# Altium PCB PICKIT2-Original-WithOut-Memory.PcbDoc
Units mm, origin at the board's own origin, x right, y up, seen from the top; angles counter-clockwise.
Board outline 73.66 x 33.66 mm, 2 copper layers (Top Layer, Bottom Layer); 69 components, 50 nets, 191 pads, 26 vias.
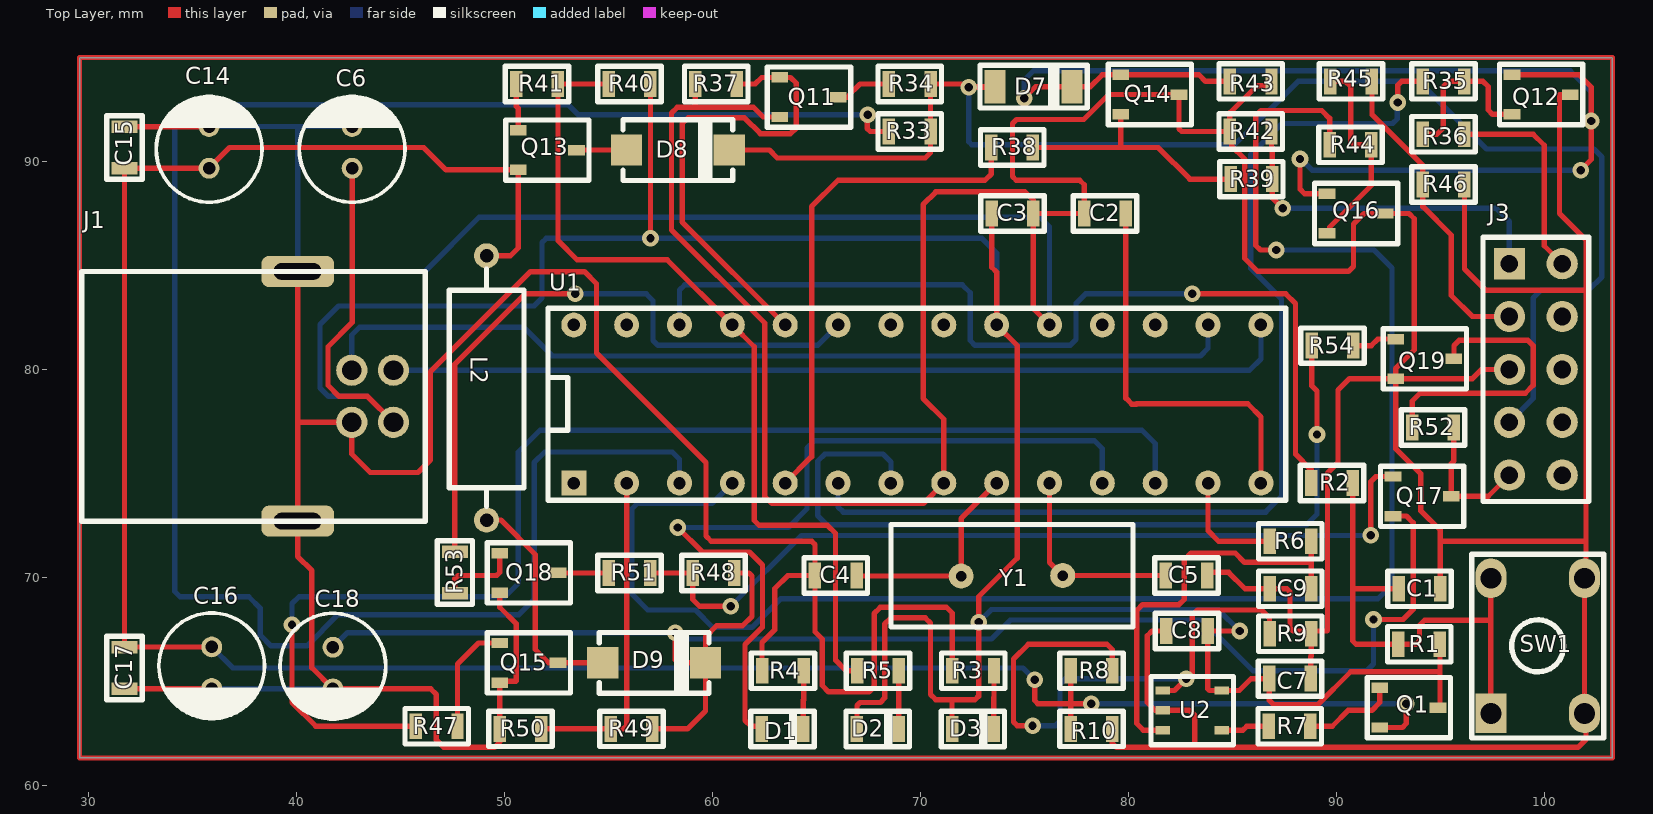
[diagram p0: Top Layer view]
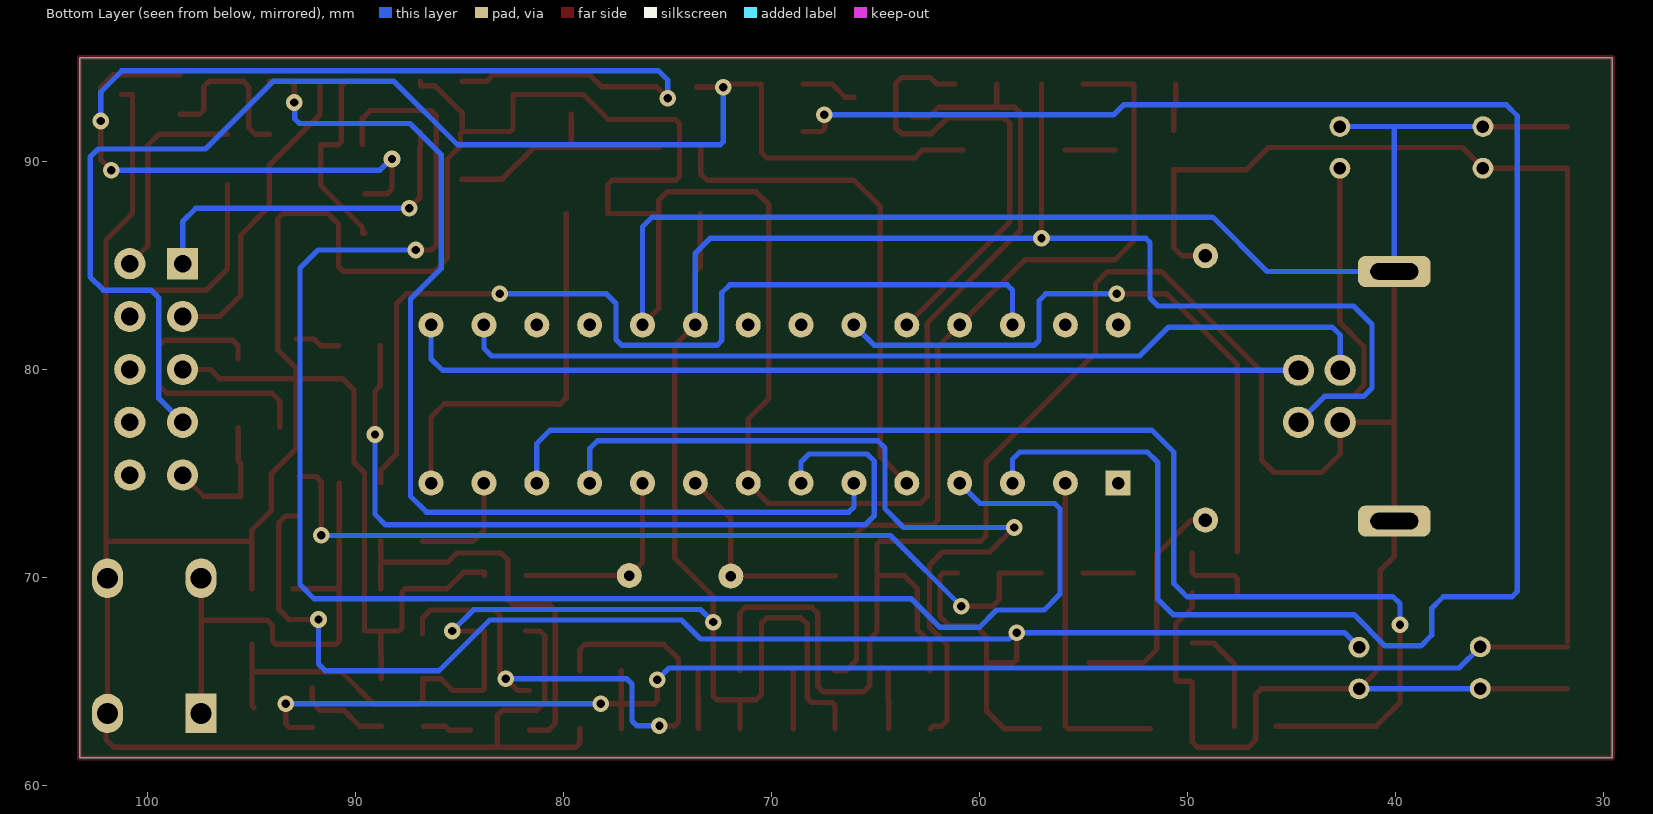
[diagram p1: Bottom Layer view, seen from below]

## Layer stack, top to bottom
Top Solder: solder mask 0.0102, Solder Resist, Dk 3.5
Top Layer: signal copper 0.0356
Dielectric 1: dielectric 0.32, FR-4, Dk 4.8
Bottom Layer: signal copper 0.0356
Bottom Solder: solder mask 0.0102, Solder Resist, Dk 3.5

## Board outline
29.591,61.341 103.251,61.341 103.251,94.996 29.591,94.996

## Design rules (kind name [scope] priority, off if disabled: settings)
Clearance [All] p1: gap=0.254 ignorepadtopadclearanceinfootprint=FALSE except(0: Arc-Hole Track-Hole SMDPad-Hole THPad-Hole Via-Hole Fill-Hole Poly-Hole Region-Hole Text-Hole)
PolygonConnect [All] p1: connectstyle=Relief reliefconductorwidth=0.254 reliefentries=4 polygonreliefangle="90 Angle" airgapwidth=0.254
RoutingVias [All] p1: holewidth=0.711 width=1.27 viastyle="Through Hole" minholewidth=0.711 minwidth=1.27 maxholewidth=0.711 maxwidth=1.27
SolderMaskExpansion [All] p1: expansion=0.102
Width [All] p1: maxlimit=0.254 minlimit=0.254 preferedwidth=0.254
30 further rules are at their usual default settings.

## Components (designator, comment, footprint, x,y, rotation, side; value= is the part's Value field where it differs from the comment)
C1 "100nF" C0805 93.98,69.469 r180 top
C2 "470nF" C0805 78.867,87.503 r0 top
C3 "100nF" C0805 74.422,87.503 r0 top
C4 "22pF" C0805 65.929,70.104 r0 top
C5 "22pF" C0805 82.788,70.104 r180 top
C6 "47uF" CAP_RAD_4mm 42.688,90.678 r90 top
C7 "22pF" C0805 87.757,65.151 r180 top
C8 "22pF" C0805 82.804,67.437 r0 top
C9 "100nF" C0805 87.773,69.469 r0 top
C14 "100uF" CAP_RAD_4mm 35.814,90.678 r90 top
C15 "102pF" C0805 31.75,90.678 r90 top
C16 "100uF" CAP_RAD_4mm 35.941,65.675 r270 top
C17 "102pF" C0805 31.75,65.659 r270 top
C18 "47uF" CAP_RAD_4mm 41.767,65.659 r270 top
D1 "RED" L0805RED 63.373,62.103 r0 top
D2 "YELLOW" L0805RED 67.945,62.103 r0 top
D3 "GREEN" L0805RED 72.517,62.103 r0 top
D7 "1N4148" SOD-80 75.438,93.599 r0 top
D8 "SS14" DO-214AC(SMA) 60.31,90.551 r180 top
D9 "SS14" DO-214AC(SMA) 59.167,65.913 r180 top
J1 "USB B Type" USB-B-TYPE 43.672,78.72 r0 top
J3 "Header 5x2 TH Pitch 2.54mm" "Header 5x2 TH Pitch 2.54mm" 99.568,80.01 r0 top
L2 "680uH" RES-0.5W-HH-MF 49.149,79.121 r90 top
Q1 "SI2301DS-N" SOT23-3 93.469,63.754 r270 top
Q11 "SI2301DS-N" SOT23-3 64.643,93.091 r270 top
Q12 "2N3906" SOT23-3 99.822,93.218 r270 top
Q13 "SI2301DS-P" SOT23-3 52.07,90.551 r270 top
Q14 "2N3906" SOT23-3 81.026,93.218 r270 top
Q15 "2N3904" SOT23-3 51.181,65.913 r270 top
Q16 "2N3906" SOT23-3 90.932,87.503 r270 top
Q17 "2N3906" SOT23-3 94.104,73.914 r270 top
Q18 "2N3904" SOT23-3 51.181,70.231 r270 top
Q19 "2N3904" SOT23-3 94.234,80.518 r270 top
R1 "10K" R0805 92.964,66.802 r180 top
R2 "33" R0805 90.773,74.549 r0 top
R3 "330" R0805 73.533,65.532 r0 top
R4 "330" R0805 64.389,65.532 r0 top
R5 "330" R0805 68.961,65.532 r0 top
R6 "10K" R0805 88.773,71.755 r0 top
R7 "100" R0805 88.741,62.865 r0 top
R8 "10K" R0805 77.216,65.532 r180 top
R9 "10K" R0805 88.773,67.31 r0 top
R10 "10K" R0805 77.216,62.738 r180 top
R33 "4K7" R0805 70.485,91.44 r0 top
R34 "1K" R0805 70.485,93.726 r0 top
R35 "10" R0805 96.139,93.853 r0 top
R36 "33" R0805 96.139,91.313 r0 top
R37 "10k" R0805 61.182,93.726 r0 top
R38 "10" R0805 75.406,90.678 r0 top
R39 "33" R0805 86.9,89.154 r0 top
R40 "10k" R0805 57.023,93.726 r0 top
R41 "330" R0805 52.578,93.726 r0 top
R42 "4k7" R0805 86.868,91.44 r0 top
R43 "820" R0805 86.868,93.853 r0 top
R44 "10" R0805 91.662,90.805 r0 top
R45 "33" R0805 91.694,93.853 r0 top
R46 "4k7" R0805 94.139,88.9 r180 top
R47 "1K" R0805 45.752,62.865 r180 top
R48 "100K" R0805 59.055,70.231 r180 top
R49 "4K7" R0805 55.118,62.738 r180 top
R50 "4K7" R0805 49.784,62.738 r180 top
R51 "10K" R0805 55.023,70.231 r180 top
R52 "100" R0805 93.631,77.216 r180 top
R53 "10K" R0805 47.625,69.247 r270 top
R54 "10K" R0805 90.805,81.153 r0 top
SW1 "Button Hole" BUTTON_HOLE_5.0mm 99.659,66.727 r180 top
U1 "PIC18F2550" DIP28_M04 69.85,78.349 r90 top
U2 "LMV321" SOT23-5 83.058,63.627 r90 top
Y1 "20MHz" HC-49S 76.835,70.079 r180 top

## Footprints (in the part's own frame and the unit in brackets; to place one, negate y for a bottom-side part, rotate by r counter-clockwise, add the part's x,y. Pads: shape width x height; smd on the part's side, far side on the other; paste and mask are expansions set on the pad)
BUTTON_HOLE_5.0mm [mm]
  rect 1.5x1.9 hole 1: 1(2.25,3.25)
  oval 1.5x1.9 hole 1: 2(2.25,-3.25) 3(-2.25,3.25) 4(-2.25,-3.25)
  silkscreen extent -3.18,-4.4 3.18,4.42, body extent -3,-3.86 3,3.86, height 5
C0805 [mm]
  rect 0.6x1.24 smd: 1(-1,0) 2(1,0)
  silkscreen extent -1.52,-0.85 1.53,0.85, body extent -1,-0.6 1,0.6, height 1
CAP_RAD_4mm [mm]
  round 1 hole 0.6: 1(-1,0) 2(1,0)
  silkscreen extent -2.63,-2.54 2.51,2.54, body extent -2.53,-2.53 2.52,2.53, height 7.29
DIP28_M04 [mm]
  rect 1.2x1.2 hole 0.6: 1(-3.8,16.51)
  round 1.2 hole 0.6: 2(-3.8,13.97) 3(-3.8,11.43) 4(-3.8,8.89) 5(-3.8,6.35) 6(-3.8,3.81) 7(-3.8,1.27) 8(-3.8,-1.27) 9(-3.8,-3.81) 10(-3.8,-6.35) 11(-3.8,-8.89) 12(-3.8,-11.43) 13(-3.8,-13.97) 14(-3.8,-16.51) 15(3.8,-16.51) 16(3.8,-13.97) 17(3.8,-11.43) 18(3.8,-8.89) 19(3.8,-6.35) 20(3.8,-3.81) 21(3.8,-1.27) 22(3.8,1.27) 23(3.8,3.81) 24(3.8,6.35) 25(3.8,8.89) 26(3.8,11.43) 27(3.8,13.97) 28(3.8,16.51)
  silkscreen extent -4.62,-17.7 4.6,17.75, body extent -3.9,-17.7 3.98,17.7, height 5.2
DO-214AC(SMA) [mm]
  rect 1.5x1.5 smd: 1(4.43,0) 2(-0.5,0)
  silkscreen extent -0.67,-1.5 4.61,1.5, body extent -0.67,-1.46 4.61,1.46, height 2.41
HC-49S [mm]
  round 1.2 hole 0.5: 1(0,-0.025) 2(4.88,0)
  silkscreen extent -3.37,-2.47 8.25,2.45, body extent -3.24,-2.33 8.11,2.32, height 3.5
"Header 5x2 TH Pitch 2.54mm" [mm]
  rect 1.5x1.5 hole 0.85: 1(-1.27,5.08)
  round 1.5 hole 0.85: 2(1.27,5.08) 3(-1.27,2.54) 4(1.27,2.54) 5(-1.27,0) 6(1.27,0) 7(-1.27,-2.54) 8(1.27,-2.54) 9(-1.27,-5.08) 10(1.27,-5.08)
  silkscreen extent -2.54,-6.35 2.54,6.35, body extent -2.54,-6.35 2.54,6.35, height 8.89
L0805RED [mm]
  rect 0.6x1.24 smd: 1(-1,0.625) 2(1,0.625)
  silkscreen extent -1.53,-0.23 1.52,1.47, body extent -1,0 1,1.25, height 1.1
R0805 [mm]
  rect 0.6x1.24 smd: 1(-2,0) 2(0,0)
  silkscreen extent -2.53,-0.85 0.53,0.85, body extent -2,-0.62 0,0.62, height 0.45
RES-0.5W-HH-MF [mm]
  round 1.2 hole 0.65: 1(-6.35,0) 2(6.35,0)
  silkscreen extent -5.7,-1.8 5.7,1.8, body extent -6.62,-1.8 6.63,1.8, height 3.9
SOD-80 [mm]
  rect 1x1.6 smd: 1(-1.85,0) 2(1.85,0)
  silkscreen extent -2.58,-1.02 2.58,1.02, body extent -1.82,-0.8 1.88,0.8, height 1.6
SOT23-3 [mm]
  rect 0.5x0.8 smd: 1(-0.95,-1.4) 2(0.95,-1.4) 3(0,1.4)
  silkscreen extent -1.45,-2 1.45,2, body extent -1.45,-1.4 1.45,1.4, height 1.3
SOT23-5 [mm]
  rect 0.4x0.7 smd: 1(0.95,1.424) 2(0,1.424) 3(-0.95,1.424) 4(-0.95,-1.425) 5(0.95,-1.425)
  silkscreen extent -1.65,-1.98 1.63,1.98, body extent -1.5,-1.5 1.5,1.5, height 1.45
USB-B-TYPE [mm]
  round 1.5 hole 0.95: 1(1,-1.25) 2(1,1.25) 3(-1,1.25) 4(-1,-1.25)
  rrect50% 3.5x1.5 hole 0.8 slot 2.3 at 0 deg: S1(-3.6,6) S2(-3.6,-6)
  silkscreen extent -13.97,-6 2.53,6, body extent -13.97,-7.42 2.53,7.37, height 11

## Part data
C1 C3 C4 C5 C7 C8 C9: library part C0805
C2 C15 C17: library part Capacitors(SMD)
C6 C14 C16 C18: library part Capacitor(Radian)
D1 D2 D3: library part LED0805
D7: library part "1N4148 (SOD-80)"
D8 D9: library part "Diode 1N4007-DO214AC(SMA)"
L2: library part "Resistors THD"
R1 R2 R3 R4 R5 R6 R7 R8 R9 R10 R33 R34 R35 R36 R37 R38 R39 R40 R41 R42 R43 R44 R45 R46 R47 R48 R49 R50 R51 R52 R53 R54: library part "Resistor SMD"
Y1: library part Crystal

## Via types
v1: diameter 0.8, hole 0.4, Top Layer to Bottom Layer, 26 vias

## Nets (pads, with @x,y where several pads share a name; then routed paths per layer and width w, separated by ;. In a path a pad name is that pad's centre, name@x,y a point inside that pad or via, vN(x,y) a via of type N, cw(c..) or ccw(c..) an arc to the next point about the centre after c; other vN are vias at no path point)
GND: C1.1 C2.1 C3.2 C4.1 C5.1 C6.2 C7.1 C8.1 C9.1 C14.2 C15.2 C16.2 C17.2 C18.2 J1.4 J1.S1 J1.S2 J3.5 Q11.2 Q12.3 Q14.3 Q15.2 Q16.3 Q18.2 Q19.2 R3.1 R4.1 R9.2 R10.1 R37.1 R42.1 R43.2 R46.1 R50.2 SW1.3 SW1.4 U1.8 U1.19 U2.2 | length 415.7
  Top Layer w0.254: C17.2 31.758,64.667 35.933,64.667 C16.2 ; C15.2 C14.2 ; J1.S1 40.072,77.47 ; Q18.2 49.781,68.583 50.571,67.793 50.571,65.049 50.546,65.024 49.842,65.024 Q15.2 49.781,63.833 49.784,63.83 R50.2 49.784,62.103 49.53,61.849 47.092,61.849 46.736,62.205 46.736,64.389 46.466,64.659 C18.2 40.754,65.672 40.754,70.345 40.072,71.028 J1.S2 40.072,77.47 ; R37.1 59.182,92.608 ; R4.1 62.389,66.889 62.992,67.492 62.992,69.469 63.627,70.104 C4.1 ; Q11.2 62.443,92.141 61.976,92.608 59.182,92.608 ; R3.1 71.533,68.294 71.247,68.58 68.072,68.58 67.772,68.28 67.772,64.77 67.518,64.516 65.583,64.516 65.278,64.821 65.278,67.056 64.929,67.405 C4.1 ; U1.19 75.422,82.927 C3.2 ; R10.1 79.216,62.052 79.419,61.849 83.185,61.849 ; C8.1 81.123,67.437 80.899,67.213 80.899,64.008 81.28,63.627 U2.2 82.931,63.627 83.185,63.373 83.185,61.849 ; C5.1 83.788,70.259 84.808,70.259 85.598,69.469 C9.1 87.608,69.469 87.757,69.32 87.757,67.586 87.906,67.437 R9.2@88.9,67.437 ; R43.2 86.868,93.643 86.169,93.643 84.868,92.343 R42.1 ; C7.1 88.757,66.218 88.773,66.234 R9.2 R9.2@88.9,67.437 ; Q19.2@92.812,79.568 90.617,79.568 90.068,79.019 90.068,75.54 89.56,75.032 89.56,67.462 89.535,67.437 R9.2@88.9,67.437 ; C1.1 94.98,71.755 ; R46.1 96.139,84.836 97.155,83.82 101.981,83.82 ; J3.5 96.962,80.01 96.52,79.568 Q19.2 ; Q12.3 100.711,93.218 100.711,87.503 101.981,86.233 101.981,83.82 ; 40.072,77.47 J1.4 42.672,75.946 43.561,75.057 45.847,75.057 46.457,75.667 46.457,79.908 51.257,84.709 53.848,84.709 54.432,84.125 54.432,80.797 59.69,75.54 59.69,72.009 59.944,71.755 64.77,71.755 64.929,71.596 C4.1 ; 59.182,92.608 58.318,92.608 58.039,92.329 58.039,86.716 62.519,82.236 62.519,73.914 62.865,73.568 70.139,73.568 U1.8 71.12,77.622 70.129,78.613 70.129,87.935 70.739,88.544 75.016,88.544 75.422,88.138 C3.2 ; C3.2 C2.1 77.867,88.884 77.648,89.103 74.6,89.103 74.422,89.281 74.422,91.821 74.618,92.017 77.843,92.017 79.045,93.218 Q14.3 82.426,91.57 82.556,91.44 R42.1 ; 83.185,61.849 101.6,61.849 101.981,62.23 101.981,63.405 SW1.3 101.909,69.723 101.981,69.795 101.981,71.755 ; R42.1 84.948,91.36 84.948,90.754 85.584,90.118 85.584,85.344 86.206,84.723 90.565,84.723 90.805,84.963 90.805,86.995 91.313,87.503 Q16.3 93.472,87.503 93.726,87.249 93.726,80.95 92.834,80.058 Q19.2 ; Q19.2 92.834,76.203 94.043,74.993 94.043,73.215 94.98,72.279 94.98,71.755 ; 94.98,71.755 101.981,71.755 ; 101.981,71.755 101.981,83.82
  Bottom Layer w0.254: C16.2@35.56,64.659 C18.2 ; C14.2@35.814,91.694 35.822,91.686 42.68,91.686 C6.2 ; 40.072,91.611 J1.S1 46.188,84.72 48.793,87.325 75.743,87.325 76.2,86.868 U1.19
NetC1_2: C1.2 R1.2 R2.2 SW1.1 SW1.2 | length 23.9
  Top Layer w0.254: R2.2 90.773,66.961 90.932,66.802 R1.2 93.831,66.802 93.98,66.951 93.98,67.706 94.234,67.96 97.394,67.96 97.409,67.945 ; 90.805,69.469 C1.2 ; SW1.1 97.409,67.945 ; SW1.2 97.409,67.945
NetC2_2: C2.2 U1.14 | length 18.9
  Top Layer w0.254: C2.2 79.867,78.629 80.159,78.337 80.369,78.337 80.391,78.359 85.725,78.359 86.36,77.724 U1.14
NetC4_2: C4.2 U1.9 Y1.2 | length 10.2
  Top Layer w0.254: C4.2 66.929,70.079 Y1.2 71.955,72.844 U1.9
NetC5_2: C5.2 U1.10 Y1.1 | length 9.7
  Top Layer w0.254: U1.10 76.2,70.739 Y1.1 C5.2
NetC9_2: C9.2 R6.2 U2.3 | length 19.9
  Top Layer w0.254: U2.3 80.706,62.677 80.391,62.992 80.391,68.431 80.667,68.707 82.423,68.707 82.677,68.961 82.677,70.866 82.995,71.183 85.128,71.183 85.573,70.739 88.773,70.739 ; C9.2 88.773,70.739 ; R6.2 88.773,70.739
NetC14_1: C14.1 C15.1 C16.1 C17.1 L2.2 Q1.2 Q13.2 R8.2 R10.2 | length 116.7
  Top Layer w0.254: C17.1@31.75,66.948 C15.1 C14.1 ; C17.1@31.758,66.667 35.933,66.667 C16.1 ; C14.1@35.814,89.694 36.798,90.678 46.126,90.678 47.203,89.601 Q13.2 50.67,85.849 50.292,85.471 L2.2 ; v1(75.489,65.1) 75.489,64.097 75.638,63.949 77.216,63.949 ; R10.2 77.216,63.949 ; R8.2 77.216,63.949 ; v1(78.199,63.949) 77.216,63.949 ; Q1.2 93.157,62.804 93.345,62.992 v1(93.345,63.949)
  Bottom Layer w0.254: C16.1@35.56,66.659 35.957,66.659 36.957,65.659 74.93,65.659 v1(75.489,65.1) ; v1(78.199,63.949) v1(93.345,63.949)
NetC18_1: C18.1 D9.2 Q17.2 R48.1 R49.1 | length 76.2
  Top Layer w0.254: R49.1 58.801,62.738 59.667,63.604 D9.2 ; v1(58.219,67.361) 58.219,66.062 58.368,65.913 D9.2 ; R48.1 61.751,70.231 61.9,70.082 61.9,68.146 61.445,67.691 60.198,67.691 59.667,67.16 D9.2 ; v1(91.77,67.996) 93.193,67.996 93.675,68.478 93.675,72.644 93.355,72.964 Q17.2
  Bottom Layer w0.254: C18.1 42.469,67.361 v1(58.219,67.361) 58.284,67.361 58.589,67.056 73.406,67.056 74.32,67.97 83.541,67.97 85.979,65.532 91.44,65.532 91.77,65.862 v1(91.77,67.996)
NetD1_1: D1.1 U1.11 | length 39.3
  Top Layer w0.254: v1(58.333,72.415) 59.517,71.232 61.788,71.232 62.408,70.612 62.408,67.626 61.57,66.788 61.57,63.144 61.849,62.865 62.236,62.865 D1.1
  Bottom Layer w0.254: v1(58.333,72.415) 63.652,72.415 64.551,73.314 64.551,76.235 64.897,76.581 78.359,76.581 78.74,76.2 U1.11
NetD1_2: D1.2 R4.2 | length 2.8
  Top Layer w0.254: D1.2 64.373,64.11 64.389,64.126 R4.2
NetD2_2: D2.2 R5.2 | length 2.8
  Top Layer w0.254: D2.2 68.961,62.728 R5.2
NetD3_2: D3.2 R3.2 | length 2.8
  Top Layer w0.254: D3.2 73.517,64.237 73.533,64.253 R3.2
NetD7_1: D7.1 D8.2 J3.7 R33.2 R34.2 | length 69.5
  Top Layer w0.254: D8.2 62.738,90.551 63.119,90.17 70.231,90.17 70.485,90.424 R33.2 R34.2 71.958,93.726 72.085,93.599 D7.1 73.588,93.574 v1(72.314,93.574)
  Bottom Layer w0.254: v1(72.314,93.574) 72.314,90.954 72.463,90.805 85.09,90.805 88.138,93.853 93.955,93.853 97.206,90.602 102.362,90.602 102.743,90.221 102.743,84.455 102.108,83.82 99.822,83.82 99.441,83.439 99.441,78.613 J3.7
NetD7_2: D7.2 Q12.1 Q14.1 Q16.1 R43.1 | length 65.4
  Top Layer w0.254: v1(74.981,93.04) 75.54,93.599 D7.2 78.172,93.599 78.741,94.168 Q14.1 83.378,94.168 83.693,93.853 R43.1 ; v1(88.24,90.119) 88.24,88.671 88.458,88.453 Q16.1 ; Q12.1 101.641,94.168 102.235,93.574 v1(102.235,91.948) 102.235,90.094 v1(101.727,89.586)
  Bottom Layer w0.254: v1(74.981,93.04) 74.981,93.904 75.438,94.361 101.219,94.361 102.235,93.345 v1(102.235,91.948) ; v1(88.24,90.119) 88.277,90.119 88.811,89.586 v1(101.727,89.586)
NetD8_1: D8.1 Q13.3 | length 2.4
  Top Layer w0.254: Q13.3 D8.1
NetD9_1: D9.1 L2.1 Q15.3 | length 11.1
  Top Layer w0.254: L2.1 49.835,72.771 51.486,71.12 51.486,66.548 52.121,65.913 Q15.3 D9.1
NetJ1_2: J1.2 U1.15 | length 43.5
  Bottom Layer w0.254: J1.2 85.812,79.97 86.36,80.518 U1.15
NetJ1_3: J1.3 U1.16 | length 44.8
  Bottom Layer w0.254: J1.3 42.672,81.661 43.053,82.042 50.927,82.042 52.309,80.66 83.454,80.66 83.82,81.026 U1.16
NetJ3_1: J3.1 R39.2 R42.2 | length 17.1
  Top Layer w0.254: R42.2 86.868,90.695 86.9,90.663 R39.2 86.9,88.265 v1(87.408,87.757)
  Bottom Layer w0.254: v1(87.408,87.757) 97.663,87.757 98.298,87.122 J3.1
NetJ3_2: J3.2 R36.2 | length 10.1
  Top Layer w0.254: R36.2 99.441,91.313 99.973,90.781 99.973,85.955 J3.2
NetJ3_3: J3.3 R45.2 R46.2 | length 15.1
  Top Layer w0.254: R45.2 91.694,92.253 94.139,89.808 R46.2 94.139,87.833 95.504,86.468 95.504,83.566 96.52,82.55 J3.3
NetJ3_9: J3.9 Q17.3 R52.1 | length 6.6
  Top Layer w0.254: R52.1 95.631,75.616 95.504,75.489 Q17.3 97.282,73.914 J3.9
NetQ1_1: Q1.1 R7.2 | length 4.5
  Top Layer w0.254: R7.2 89.789,62.865 90.551,63.627 91.694,63.627 92.069,64.002 Q1.1
NetQ11_1: Q11.1 R37.2 U1.24 | length 23
  Top Layer w0.254: R37.2 62.055,93.726 62.37,94.041 Q11.1 63.754,94.041 64.033,93.762 64.033,91.618 63.754,91.338 62.306,91.338 61.544,92.1 58.826,92.1 58.547,91.821 58.547,87.102 U1.24
NetQ11_3: Q11.3 R34.1 | length 2.7
  Top Layer w0.254: Q11.3 66.458,93.091 67.093,93.726 R34.1
NetQ12_2: Q12.2 R35.2 R36.1 | length 7.8
  Top Layer w0.254: R36.1 94.82,91.313 95.123,91.616 95.123,93.599 95.377,93.853 R35.2 97.028,93.853 97.282,93.599 97.282,92.478 97.492,92.268 Q12.2
NetQ13_1: Q13.1 R41.1 | length 2.3
  Top Layer w0.254: R41.1 50.578,92.65 50.67,92.558 Q13.1
NetQ14_2: Q14.2 R38.2 R39.1 | length 11.7
  Top Layer w0.254: R38.2 79.629,90.678 ; Q14.2 79.626,90.681 79.629,90.678 ; R39.1 82.946,89.154 81.422,90.678 79.629,90.678
NetQ15_1: Q15.1 R47.1 | length 5.4
  Top Layer w0.254: R47.1 47.752,65.847 48.768,66.863 Q15.1
NetQ16_2: Q16.2 R44.2 R45.1 | length 10
  Top Layer w0.254: Q16.2 89.655,86.553 89.655,86.843 91.662,88.85 R44.2 90.827,90.805 90.678,90.954 90.678,93.599 90.424,93.853 R45.1
NetQ17_1: Q17.1 R48.2 R51.1 | length 41.2
  Top Layer w0.254: R51.1 R48.2 59.055,68.961 59.385,68.631 v1(60.884,68.631) ; v1(91.643,72.034) 91.643,74.625 91.882,74.864 Q17.1
  Bottom Layer w0.254: v1(60.884,68.631) 64.287,72.034 v1(91.643,72.034)
NetQ18_1: Q18.1 R53.2 | length 3.9
  Top Layer w0.254: R53.2 47.625,69.955 47.774,70.104 49.632,70.104 49.781,70.253 Q18.1
NetQ18_3: Q18.3 R51.2 | length 2.4
  Top Layer w0.254: Q18.3 R51.2
NetQ19_1: Q19.1 R54.2 | length 2.2
  Top Layer w0.254: R54.2 91.662,81.153 91.977,81.468 Q19.1
NetQ19_3: Q19.3 R52.2 | length 14
  Top Layer w0.254: R52.2 93.631,78.496 94.002,78.867 99.06,78.867 99.441,79.248 99.441,81.153 99.187,81.407 95.885,81.407 95.634,81.156 Q19.3
NetR2_1: R2.1 U1.26 | length 45.1
  Top Layer w0.254: v1(83.058,83.642) 87.554,83.642 88.019,83.177 88.019,75.938 88.773,75.184 R2.1
  Bottom Layer w0.254: U1.26 58.42,83.82 58.674,84.074 72.009,84.074 72.39,83.693 72.39,81.407 72.629,81.168 77.191,81.168 77.47,81.447 77.47,83.185 77.927,83.642 v1(83.058,83.642)
NetR5_1: R5.1 R40.1 R41.2 U1.25 | length 41.4
  Top Layer w0.254: R40.1 R41.2 52.578,86.199 53.496,85.281 57.828,85.281 U1.25 62.011,81.098 62.011,72.757 62.251,72.517 65.532,72.517 65.913,72.136 65.913,66.04 66.421,65.532 R5.1
NetR7_1: R7.1 U2.4 | length 2.3
  Top Layer w0.254: U2.4 85.496,62.677 85.684,62.865 R7.1
NetR8_1: R8.1 R9.1 U2.1 | length 28.8
  Top Layer w0.254: v1(75.387,62.89) 74.651,62.89 74.473,63.068 74.473,66.091 75.184,66.802 78.962,66.802 79.216,66.548 R8.1 ; U2.1 82.205,64.577 v1(82.779,65.151) 83.058,65.43 83.058,68.199 83.312,68.453 86.392,68.453 86.773,68.072 R9.1
  Bottom Layer w0.254: v1(75.387,62.89) 76.479,62.89 76.708,63.119 76.708,64.897 76.962,65.151 v1(82.779,65.151)
NetR33_1: R33.1 U1.3 | length 93.5
  Top Layer w0.254: v1(67.462,92.253) 67.437,92.227 67.437,91.589 67.586,91.44 R33.1
  Bottom Layer w0.254: U1.3 58.42,75.692 58.074,76.038 51.943,76.038 51.435,75.53 51.435,68.961 50.698,68.224 42.012,68.224 40.513,66.726 38.786,66.726 38.278,67.234 38.278,68.529 37.719,69.088 34.417,69.088 34.163,69.342 34.163,92.202 34.696,92.735 53.061,92.735 53.543,92.253 v1(67.462,92.253)
NetR35_1: R35.1 U1.6 | length 50.6
  Top Layer w0.254: v1(92.939,92.837) 92.939,93.679 93.113,93.853 R35.1
  Bottom Layer w0.254: U1.6 66.04,73.406 66.294,73.152 86.589,73.152 87.351,73.914 87.351,83.388 85.877,84.861 85.877,90.336 87.369,91.828 92.688,91.828 92.916,92.056 92.916,92.815 v1(92.939,92.837)
NetR38_1: R38.1 U1.5 | length 24.4
  Top Layer w0.254: U1.5 64.77,75.819 64.77,87.833 66.04,89.103 73.101,89.103 73.406,89.408 R38.1
NetR44_1: R44.1 U1.4 | length 81
  Top Layer w0.254: v1(87.097,85.75) 86.335,85.75 86.106,85.979 86.106,92.202 86.36,92.456 89.281,92.456 89.662,92.075 R44.1
  Bottom Layer w0.254: U1.4 59.979,73.568 56.388,73.568 56.134,73.314 56.134,69.215 56.896,68.453 59.182,68.453 60.02,67.615 61.9,67.615 63.271,68.986 91.973,68.986 92.659,69.672 92.659,84.887 91.796,85.75 v1(87.097,85.75)
NetR47_2: R47.2 U1.12 | length 62
  Top Layer w0.254: v1(39.802,67.742) 39.802,64.008 40.945,62.865 R47.2
  Bottom Layer w0.254: v1(39.802,67.742) 39.802,68.758 40.132,69.088 50.038,69.088 50.673,69.723 50.673,76.038 51.724,77.089 80.645,77.089 81.28,76.454 U1.12
NetR49_2: R49.2 R50.1 U1.2 | length 15.8
  Top Layer w0.254: R50.1 R49.2 55.731,62.738 55.88,62.887 U1.2
NetR53_1: R53.1 U1.23 | length 31.4
  Top Layer w0.254: R53.1 47.625,80.264 51.003,83.642 v1(53.416,83.642)
  Bottom Layer w0.254: v1(53.416,83.642) 56.82,83.642 57.15,83.312 57.15,81.407 57.389,81.168 65.059,81.168 U1.23
NetR54_1: R54.1 U1.7 | length 40
  Top Layer w0.254: R54.1 88.805,79.216 89.052,78.969 v1(89.052,76.886)
  Bottom Layer w0.254: U1.7 68.58,75.565 68.199,75.946 65.405,75.946 65.059,75.6 65.059,72.99 65.507,72.542 88.544,72.542 89.052,73.05 v1(89.052,76.886)
NetU1_17: U1.17
VCC: C3.1 C6.1 C7.2 C8.2 D2.1 D3.1 J1.1 Q1.3 R1.1 R40.2 U1.20 U2.5 | length 143.2
  Top Layer w0.254: C6.1 42.688,82.261 41.529,81.102 41.529,79.248 42.062,78.715 43.427,78.715 J1.1 ; v1(57.023,86.309) R40.2 ; D2.1 66.945,63.859 67.094,64.008 68.072,64.008 68.28,64.216 68.28,67.772 68.58,68.072 70.231,68.072 70.485,67.818 70.485,64.389 70.739,64.135 71.517,64.135 ; D3.1 71.517,64.135 ; C3.1 73.422,84.921 73.66,84.684 U1.20 74.651,81.158 74.651,70.942 72.796,69.088 v1(72.796,67.869) 72.796,64.309 72.622,64.135 71.517,64.135 ; v1(85.344,67.437) C8.2 83.804,64.659 83.886,64.577 U2.5 85.319,64.577 85.892,65.151 C7.2 86.757,64.119 86.97,63.906 89.103,63.906 90.678,65.481 94.964,65.481 ; Q1.3 94.964,63.849 94.964,65.481 ; R1.1 94.964,65.481
  Bottom Layer w0.254: J1.1 43.427,78.715 41.554,78.715 41.148,79.121 41.148,82.169 42.037,83.058 51.435,83.058 51.816,83.439 51.816,86.106 52.019,86.309 v1(57.023,86.309) 72.949,86.309 73.66,85.598 U1.20 ; v1(72.796,67.869) 73.406,68.478 84.303,68.478 v1(85.344,67.437)
VDD_TGT_ADJ: R6.1 U1.13 | length 5.4
  Top Layer w0.254: U1.13 83.82,72.263 84.328,71.755 R6.1
pads on no net: J3.4 J3.6 J3.8 J3.10 U1.1 U1.18 U1.21 U1.22 U1.27 U1.28
copper on no net: | length 214.6
  Top Layer w0.254: 29.591,61.341 29.591,94.996 103.251,94.996 103.251,61.341 29.591,61.341